# Altium PCB PANEL_ALL_3.PcbDoc
Units mil, origin at the board's own origin, x right, y up, seen from the top; angles counter-clockwise.
Board outline 12404 x 3907.57 mil, 2 copper layers (Top Layer, Bottom Layer); 37 components, 0 nets, 185 pads, 0 vias.
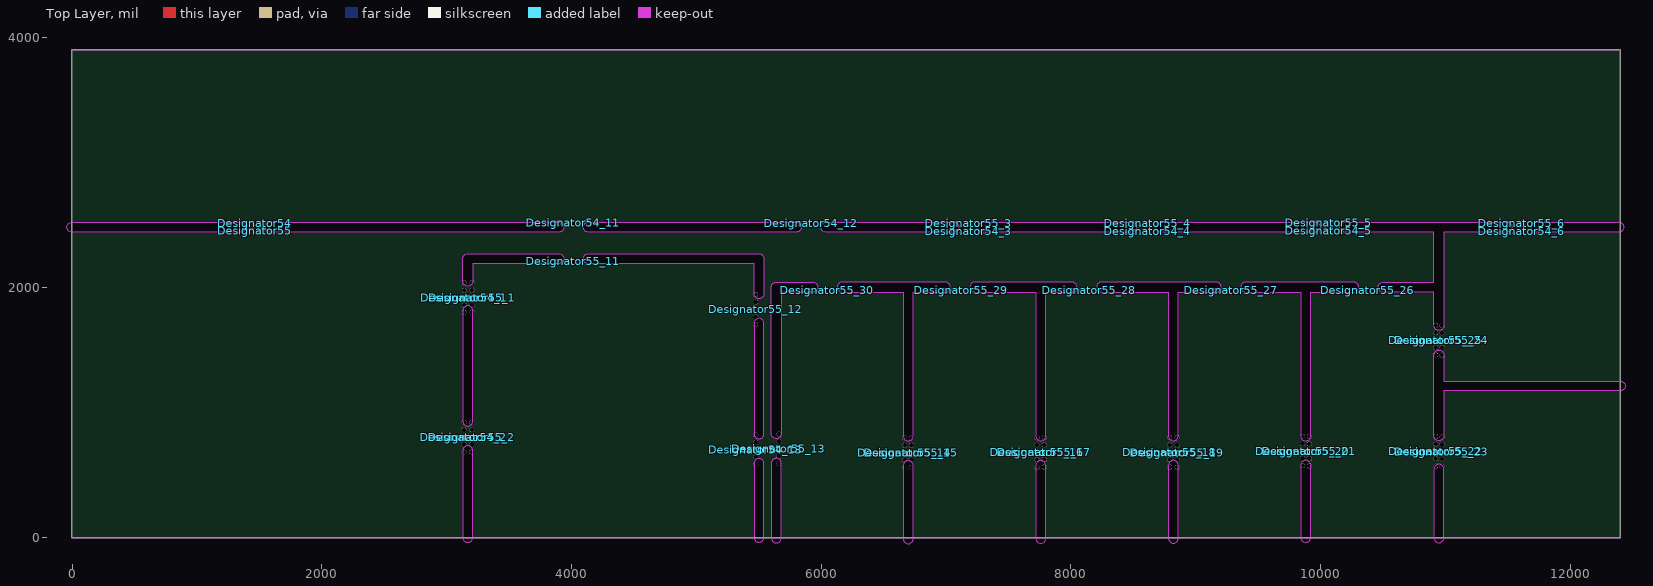
[diagram p0: Top Layer view]
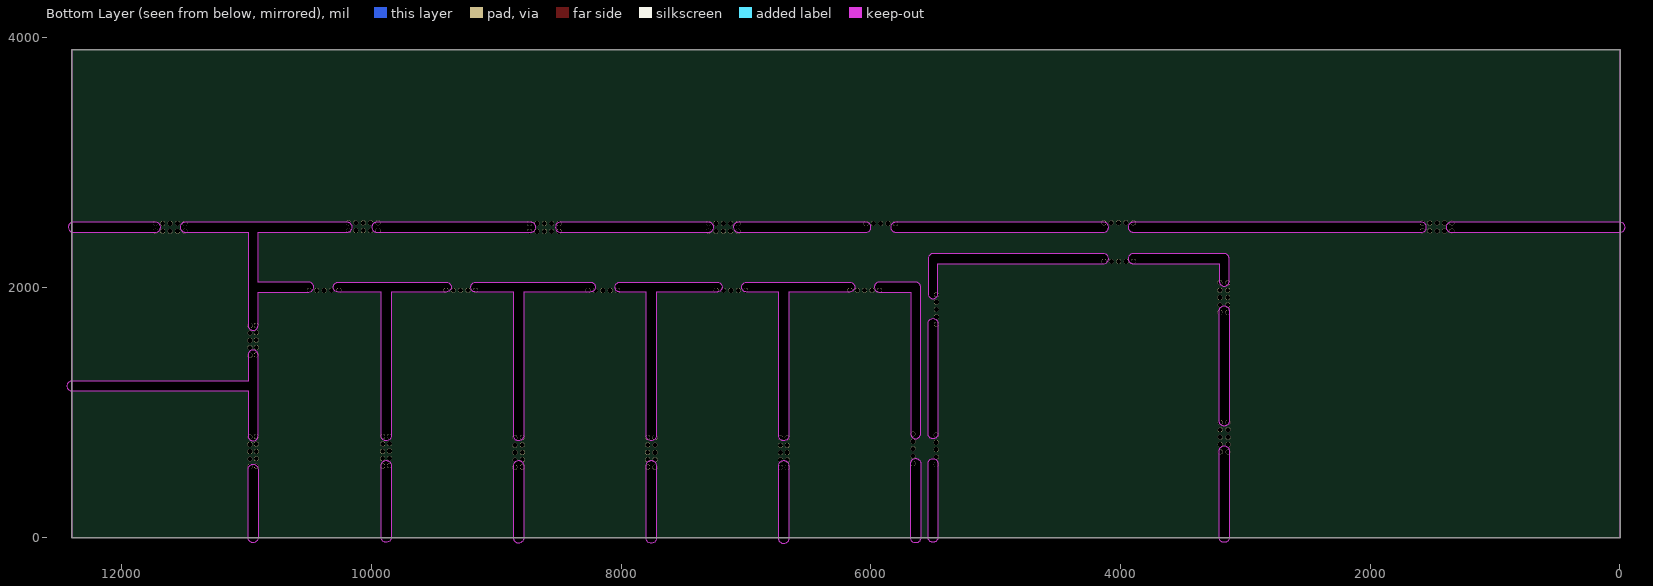
[diagram p1: Bottom Layer view, seen from below]

## Layer stack, top to bottom
Top Solder: solder mask 0.4, Solder Resist, Dk 3.5
Top Layer: signal copper 1.4
Dielectric 1: dielectric 12.6, FR-4, Dk 4.8
Bottom Layer: signal copper 1.4
Bottom Solder: solder mask 0.4, Solder Resist, Dk 3.5

## Board outline
-3,-3 -3,3904.57 12401,3904.57 12401,-3
cut-out: 6038,2443.61 cw(c6038,2483) 6038,2522.39 7062,2522.39 cw(c7062,2483) 7101.39,2483 cw(c7062,2483) 7062,2443.61
cut-out: 7298,2443.61 cw(c7298,2483) 7298,2522.39 8487,2522.39 cw(c8487,2483) 8526.39,2483 cw(c8487,2483) 8487,2443.61
cut-out: 8723,2443.61 cw(c8723,2483) 8723,2522.39 9958,2522.39 cw(c9958,2483) 9997.39,2483 cw(c9958,2483) 9958,2443.61
cut-out: 6658.61,-13 ccw(c6698,-13) 6737.39,-13 6737.39,575 ccw(c6698,575) 6658.61,575
cut-out: 7719.61,-10 ccw(c7759,-10) 7798.39,-10 7798.39,575 ccw(c7759,575) 7719.61,575
cut-out: 8781.61,-9 ccw(c8821,-9) 8860.39,-9 8860.39,575 ccw(c8821,575) 8781.61,575
cut-out: 9842.61,-2 ccw(c9882,-2) 9921.39,-2 9921.39,575 ccw(c9882,575) 9842.61,575
cut-out: 10908.61,-5 ccw(c10948,-5) 10987.39,-5 10987.39,545 ccw(c10948,545) 10908.61,545
cut-out: 10908.61,811 10908.61,1460 cw(c10948,1460) 10987.39,1460 10987.39,1250.39 12400,1250.39 cw(c12400,1211) 12439.39,1211 cw(c12400,1211) 12400,1171.61 10987.39,1171.61 10987.39,811 cw(c10948,811)
cut-out: 10502,1963.61 cw(c10502,2003) 10502,2042.39 10908.61,2042.39 10908.61,2443.61 10194,2443.61 cw(c10194,2483) 10194,2522.39 11493,2522.39 cw(c11493,2483) 11532.39,2483 cw(c11493,2483) 11493,2443.61 10987.39,2443.61 10987.39,1696 cw(c10948,1696) 10908.61,1696 10908.61,1963.61
cut-out: 9401,1963.61 9842.61,1963.61 9842.61,811 ccw(c9882,811) 9921.39,811 9921.39,1963.61 10266,1963.61 ccw(c10266,2003) 10305.39,2003 ccw(c10266,2003) 10266,2042.39 9401,2042.39 ccw(c9401,2003)
cut-out: 8246,1963.61 8781.61,1963.61 8781.61,811 ccw(c8821,811) 8860.39,811 8860.39,1963.61 9165,1963.61 ccw(c9165,2003) 9204.39,2003 ccw(c9165,2003) 9165,2042.39 8246,2042.39 ccw(c8246,2003)
cut-out: 7231,1963.61 7719.61,1963.61 7719.61,811 ccw(c7759,811) 7798.39,811 7798.39,1963.61 8010,1963.61 ccw(c8010,2003) 8049.39,2003 ccw(c8010,2003) 8010,2042.39 7231,2042.39 ccw(c7231,2003)
cut-out: 6169,1963.61 6658.61,1963.61 6658.61,811 ccw(c6698,811) 6737.39,811 6737.39,1963.61 6995,1963.61 ccw(c6995,2003) 7034.39,2003 ccw(c6995,2003) 6995,2042.39 6169,2042.39 ccw(c6169,2003)
cut-out: 5601.61,-7 ccw(c5641,-7) 5680.39,-7 5680.39,592 ccw(c5641,592) 5601.61,592
cut-out: 5601.61,828 5601.61,2003 cw(c5641,2003) 5641,2042.39 5933,2042.39 cw(c5933,2003) 5972.39,2003 cw(c5933,2003) 5933,1963.61 5680.39,1963.61 5680.39,828 cw(c5641,828)
cut-out: 3129.61,-3 ccw(c3169,-3) 3208.39,-3 3208.39,693 ccw(c3169,693) 3129.61,693
cut-out: 3129.61,929 ccw(c3169,929) 3208.39,929 3208.39,1814 ccw(c3169,1814) 3129.61,1814
cut-out: 5462.61,-2 ccw(c5502,-2) 5541.39,-2 5541.39,591 ccw(c5502,591) 5462.61,591
cut-out: 5462.61,827 ccw(c5502,827) 5541.39,827 5541.39,1713 ccw(c5502,1713) 5462.61,1713
cut-out: 11729,2443.61 cw(c11729,2483) 11729,2522.39 12389,2522.39 cw(c12389,2483) 12428.39,2483 cw(c12389,2483) 12389,2443.61
cut-out: 4135,2443.61 cw(c4135,2483) 4135,2522.39 5802,2522.39 cw(c5802,2483) 5841.39,2483 cw(c5802,2483) 5802,2443.61
cut-out: 4135,2191.61 cw(c4135,2231) 4135,2270.39 5502,2270.39 cw(c5502,2231) 5541.39,2231 5541.39,1949 cw(c5502,1949) 5462.61,1949 5462.61,2191.61
cut-out: 3129.61,2050 3129.61,2231 cw(c3169,2231) 3169,2270.39 3899,2270.39 cw(c3899,2231) 3938.39,2231 cw(c3899,2231) 3899,2191.61 3208.39,2191.61 3208.39,2050 cw(c3169,2050)
cut-out: 1589,2443.61 cw(c1589,2483) 1589,2522.39 3899,2522.39 cw(c3899,2483) 3938.39,2483 cw(c3899,2483) 3899,2443.61
cut-out: -2,2443.61 cw(c-2,2483) -2,2522.39 1353,2522.39 cw(c1353,2483) 1392.39,2483 cw(c1353,2483) 1353,2443.61

## Design rules (kind name [scope] priority, off if disabled: settings)
Clearance [All] p1: gap=10 ignorepadtopadclearanceinfootprint=FALSE except(0: Arc-Hole Track-Hole SMDPad-Hole THPad-Hole Via-Hole Fill-Hole Poly-Hole Region-Hole Text-Hole)
PolygonConnect [All] p1: connectstyle=Relief reliefconductorwidth=10 reliefentries=4 polygonreliefangle="90 Angle" airgapwidth=10
RoutingVias [All] p1: holewidth=28 width=50 viastyle="Through Hole" minholewidth=28 minwidth=50 maxholewidth=28 maxwidth=50
SolderMaskExpansion [All] p1: expansion=4 istentingtop=FALSE
Width [All] p1: maxlimit=10 minlimit=10 preferedwidth=10
30 further rules are at their usual default settings.

## Components (designator, comment, footprint, x,y, rotation, side; value= is the part's Value field where it differs from the comment)
Designator54 "Comment" "Stamp Hole" 1345.89,2516 r0 top
Designator54_1 "Comment" "Stamp Hole" 3141,1800.89 r90 top
Designator54_2 "Comment" "Stamp Hole" 3139,682.89 r90 top
Designator54_3 "Comment" "Stamp Hole" 7300.11,2451 r180 top
Designator54_4 "Comment" "Stamp Hole" 8734.11,2450 r180 top
Designator54_5 "Comment" "Stamp Hole" 10184.11,2455 r180 top
Designator54_6 "Comment" "Stamp Hole" 11731.11,2451 r180 top
Designator54_11 "Comment" "Stamp Hole" 3897.89,2518 r0 top
Designator54_12 "Comment" "Stamp Hole" 5802.89,2513 r0 top
Designator54_13 "Comment" "Stamp Hole" 5477,582.83 r90 top
Designator55 "Comment" "Stamp Hole" 1346.06,2453.24 r0 top
Designator55_1 "Comment" "Stamp Hole" 3203.76,1801.06 r90 top
Designator55_2 "Comment" "Stamp Hole" 3201.76,683.06 r90 top
Designator55_3 "Comment" "Stamp Hole" 7299.94,2513.76 r180 top
Designator55_4 "Comment" "Stamp Hole" 8733.94,2512.76 r180 top
Designator55_5 "Comment" "Stamp Hole" 10183.94,2517.76 r180 top
Designator55_6 "Comment" "Stamp Hole" 11730.94,2513.76 r180 top
Designator55_11 "Comment" "Stamp Hole" 3895.89,2209 r0 top
Designator55_12 "Comment" "Stamp Hole" 5475,1705.89 r90 top
Designator55_13 "Comment" "Stamp Hole" 5662,589.89 r90 top
Designator55_14 "Comment" "Stamp Hole" 6670,558.89 r90 top
Designator55_15 "Comment" "Stamp Hole" 6723,558.89 r90 top
Designator55_16 "Comment" "Stamp Hole" 7729,560.89 r90 top
Designator55_17 "Comment" "Stamp Hole" 7787,561.89 r90 top
Designator55_18 "Comment" "Stamp Hole" 8792,561.89 r90 top
Designator55_19 "Comment" "Stamp Hole" 8851,559.89 r90 top
Designator55_20 "Comment" "Stamp Hole" 9856,571.89 r90 top
Designator55_21 "Comment" "Stamp Hole" 9910,569.89 r90 top
Designator55_22 "Comment" "Stamp Hole" 10923,568.89 r90 top
Designator55_23 "Comment" "Stamp Hole" 10973,566.89 r90 top
Designator55_24 "Comment" "Stamp Hole" 10973,1457.89 r90 top
Designator55_25 "Comment" "Stamp Hole" 10923,1460.89 r90 top
Designator55_26 "Comment" "Stamp Hole" 10497.11,1977 r180 top
Designator55_27 "Comment" "Stamp Hole" 9404.11,1978 r180 top
Designator55_28 "Comment" "Stamp Hole" 8265.11,1976 r180 top
Designator55_29 "Comment" "Stamp Hole" 7239.11,1977 r180 top
Designator55_30 "Comment" "Stamp Hole" 6168.11,1978 r180 top

## Footprints (in the part's own frame and the unit in brackets; to place one, negate y for a bottom-side part, rotate by r counter-clockwise, add the part's x,y. Pads: shape width x height; smd on the part's side, far side on the other; paste and mask are expansions set on the pad)
"Stamp Hole" [mm]
  round 1 hole 1 mask+0.102: 5(0,0) 5(1.5,0) 5(3,0) 5(4.5,0) 5(6,0)

## Nets (pads, with @x,y where several pads share a name; then routed paths per layer and width w, separated by ;. In a path a pad name is that pad's centre, name@x,y a point inside that pad or via, vN(x,y) a via of type N, cw(c..) or ccw(c..) an arc to the next point about the centre after c; other vN are vias at no path point)
pads on no net: Designator54.5 Designator54_1.5 Designator54_2.5 Designator54_3.5 Designator54_4.5 Designator54_5.5 Designator54_6.5 Designator54_11.5 Designator54_12.5 Designator54_13.5 Designator55.5 Designator55_1.5 Designator55_2.5 Designator55_3.5 Designator55_4.5 Designator55_5.5 Designator55_6.5 Designator55_11.5 Designator55_12.5 Designator55_13.5 Designator55_14.5 Designator55_15.5 Designator55_16.5 Designator55_17.5 Designator55_18.5 Designator55_19.5 Designator55_20.5 Designator55_21.5 Designator55_22.5 Designator55_23.5 Designator55_24.5 Designator55_25.5 Designator55_26.5 Designator55_27.5 Designator55_28.5 Designator55_29.5 Designator55_30.5

## Keep-outs
Keep-Out Layer:
  lines w8: -3,-3 -3,3904.57 12401,3904.57 12401,-3 12392,-3 -3,-3

## Silkscreen, mask and mechanical layers (free items; w line width, h text height)
Mechanical 1:
  lines w78.74: -2,2483 1353,2483 ; 1589,2483 3899,2483 ; 3169,-3 3169,693 ; 3169,929 3169,1814 ; 3169,2050 3169,2210 3169,2231 3899,2231 ; 4135,2231 5480,2231 5493,2231 5502,2231 5502,1949 ; 4135,2483 5802,2483 ; 5502,-2 5502,591 ; 5502,827 5502,1713 ; 5641,-7 5641,592 ; 5641,828 5641,2003 5933,2003 ; 6038,2483 7062,2483 ; 6169,2003 6995,2003 ; 6698,-13 6698,575 ; 6698,811 6698,2000 ; 7231,2003 8010,2003 ; 7298,2483 8487,2483 ; 7759,-10 7759,575 ; 7759,811 7759,1984 ; 8246,2003 9165,2003 ; 8723,2483 9958,2483 ; 8821,-9 8821,575 ; 8821,811 8821,1993 ; 9401,2003 10266,2003 ; 9882,-2 9882,575 ; 9882,811 9882,1993 ; 10194,2483 11493,2483 ; 10502,2003 10940,2003 ; 10948,-5 10948,545 ; 10948,811 10948,1460 ; 10948,1696 10948,2466 ; 10969,1211 12400,1211 ; 11729,2483 12389,2483

## Panel: embedded boards
"C:\Users\Phan Thi Ngoc Yen\Downloads\STM32F030C8T6_PCB_2.0 (1).pcbdoc" at 5672,1966, 5 rows x 1 columns, spacing 1062.99 x 2043.74, rotation 270
"PCB1.PcbDoc" at 12397.57,3907.36, 1 rows x 1 columns, spacing 1456.69 x 12479.74, rotation 180
"MCU_BOARD.PcbDoc" at 12390,2426, 2 rows x 1 columns, spacing 1248.74 x 1483.74, rotation 180
"PCB3.PcbDoc" at 0,0, 1 rows x 1 columns, spacing 2528.74 x 3208.74, rotation 0
"PCB4.PcbDoc" at 3210,-12, 1 rows x 1 columns, spacing 2293.74 x 2338.74, rotation 0